# Altium PCB LTR-329ALS-01 StemmaQT.PcbDoc
Units mil, origin at the board's own origin, x right, y up, seen from the top; angles counter-clockwise.
Board outline 1102.05 x 426.75 mil, 2 copper layers (Top Layer, Bottom Layer), stack 61.756 mil thick; 8 components, 7 nets, 39 pads, 19 vias.
Unrouted connection lines stored in the file: 11.
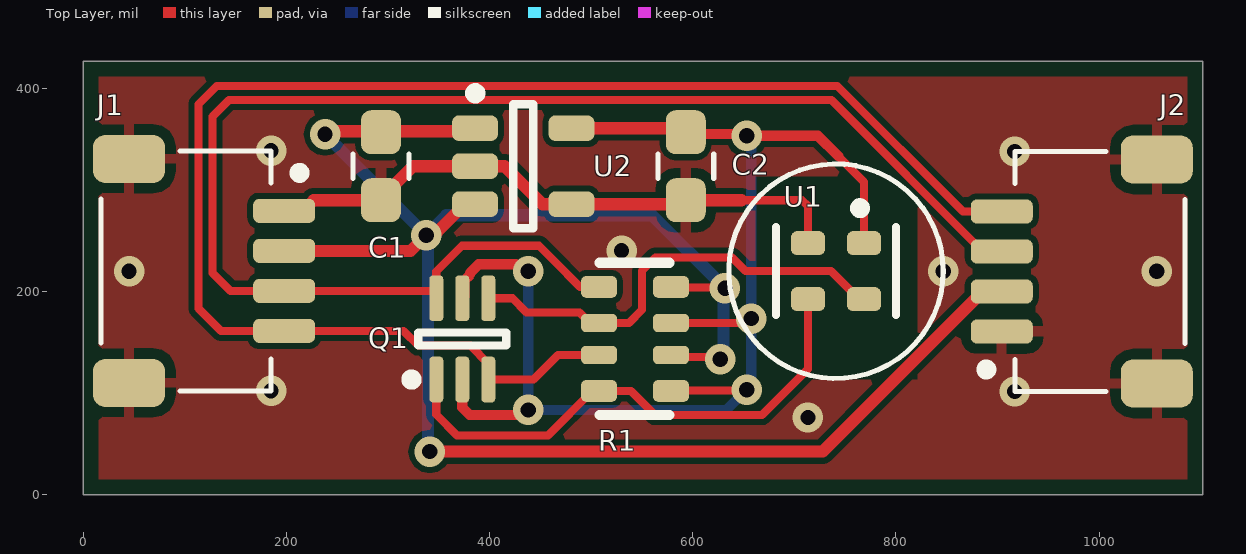
[diagram p0: Top Layer view]
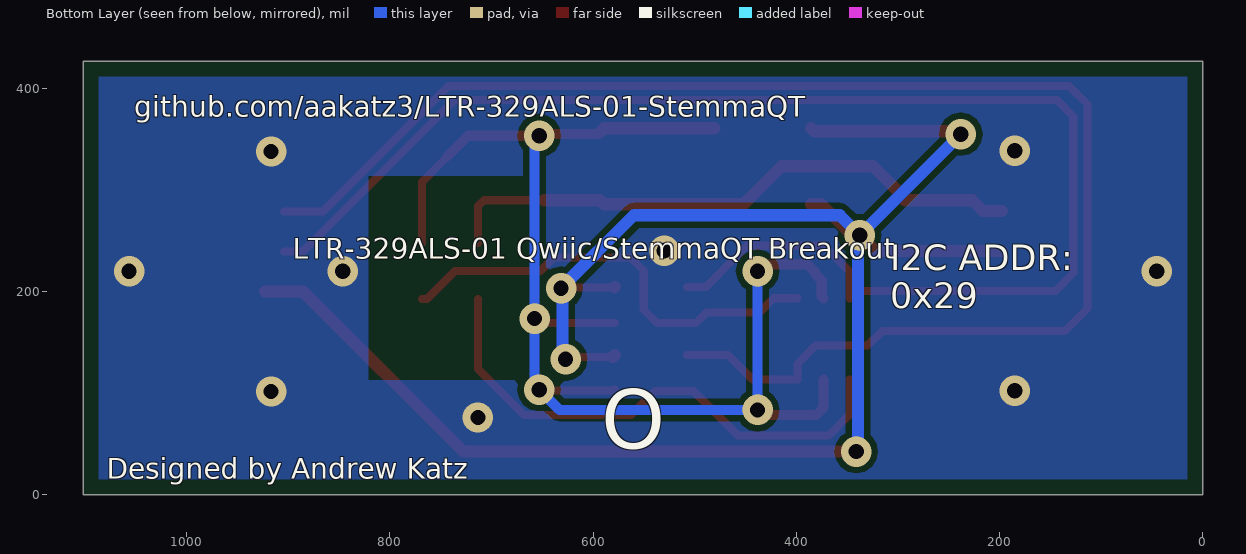
[diagram p1: Bottom Layer view, seen from below]
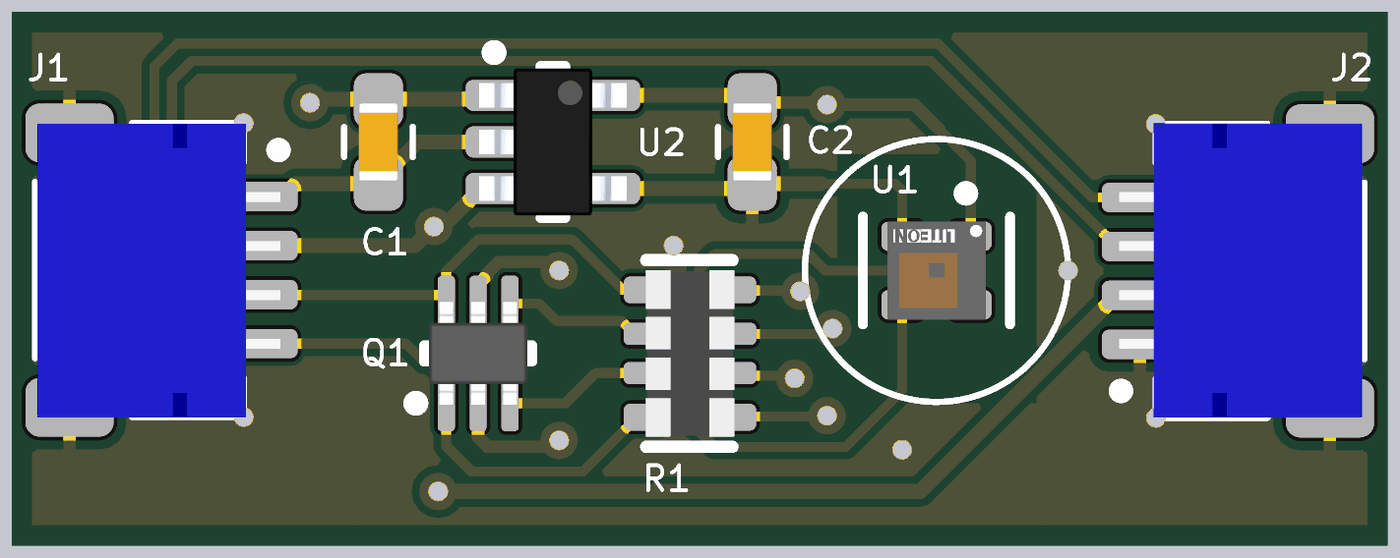
[diagram p2: 3D render of the assembled board from above, using the file's embedded part models]

## Layer stack, top to bottom
Top Solder: solder mask 1, SM-001, Dk 4
Top Layer: signal copper 1.378
Dielectric 1: core 59, Core-043, Dk 4.3
Bottom Layer: signal copper 1.378
Bottom Solder: solder mask 1, SM-001, Dk 4

## Board outline
0,426.75 1102.05,426.75 1102.05,0 0,0

## Design rules (kind name [scope] priority, off if disabled: settings)
BoardOutlineClearance EdgeComp [InComponentClass('EDGE')] p1: gap=0 ignorepadtopadclearanceinfootprint=FALSE
BoardOutlineClearance IgnoreSilkOverhang [OnSilkscreen and InAnyComponent] p2: gap=0 ignorepadtopadclearanceinfootprint=FALSE
BoardOutlineClearance SilkClearance [OnSilkscreen] p3: gap=10 ignorepadtopadclearanceinfootprint=FALSE
BoardOutlineClearance [All] p4: gap=15 ignorepadtopadclearanceinfootprint=FALSE
Clearance [All] p1: gap=6 ignorepadtopadclearanceinfootprint=FALSE except(0: Arc-Hole Track-Hole SMDPad-Hole THPad-Hole Via-Hole Fill-Hole Poly-Hole Region-Hole Text-Hole)
ComponentClearance [All] p1: gap=1 collisioncheckmode=3 verticalgap=1 showdistances=FALSE
DiffPairsRouting [All] p1: maxlimit=393.7 minlimit=6 mostfreqgap=8 toplayer_minwidth=6 toplayer_maxwidth=15 toplayer_prefwidth=8 bottomlayer_minwidth=6 bottomlayer_maxwidth=15 bottomlayer_prefwidth=8 maxuncoupledlength=500
HoleSize [All] p1: absolutevalues=TRUE maxlimit=265 minlimit=13 maxpercent=80.000 minpercent=20.000
HoleToHoleClearance [All] p1: gap=10 allowstackedmicrovias=FALSE
MinimumAnnularRing [All] p1: minimumring=7
MinimumSolderMaskSliver [All] p1: minsoldermaskwidth=0
PlaneClearance [All] p1: clearance=10
PlaneConnect [All] p1: planeconnectstyle=Direct reliefexpansion=16 reliefentries=4 reliefconductorwidth=6 reliefairgap=6
PolygonConnect PolygonConnect_1 [All] p1: thpad.connectstyle=Relief thpad.reliefconductorwidth=20 thpad.reliefentries=4 thpad.polygonreliefangle="90 Angle" thpad.airgapwidth=10 smdpad.connectstyle=Relief smdpad.reliefconductorwidth=10 smdpad.reliefentries=4 smdpad.polygonreliefangle="90 Angle" smdpad.airgapwidth=10 via.connectstyle=Direct via.reliefconductorwidth=10 via.reliefentries=4 via.polygonreliefangle="90 Angle" via.airgapwidth=10
PolygonConnect [All] p2: connectstyle=Relief reliefconductorwidth=8 reliefentries=4 polygonreliefangle="90 Angle" airgapwidth=6
RoutingCorners [All] p1: cornerstyle=45-Degree minsetback=49.21 maxsetback=49.21
RoutingVias [All] p1: holewidth=15 width=30 viastyle="Through Hole" minholewidth=13 minwidth=27 maxholewidth=100 maxwidth=114
SilkToSilkClearance [All] p1: silktosilkclearance=0
SilkToSolderMaskClearance [IsPad] p1: minsilkscreentomaskgap=6 clearancetoexposedcopper=TRUE
SolderMaskExpansion TentVia [IsVia] p1: expansion=4 istentingtop=TRUE
SolderMaskExpansion [All] p2: expansion=2.95 istentingtop=FALSE
Width [All] p1: maxlimit=400 minlimit=6 preferedwidth=8
20 further rules are at their usual default settings.

## Classes and differential pairs
component class EDGE: J1 J2
net class PWR: GND VCC VINT
polygon class PowerPolys: GNDB GNDT

## Components (designator, comment, footprint, x,y, rotation, side; value= is the part's Value field where it differs from the comment)
C1 "CAP 0603 1UF 16V 10% X7R" 0603_CAP 293.19,323.31 r90 top value=1UF
C2 "CAP 0603 1UF 16V 10% X7R" 0603_CAP 593.19,323.31 r90 top value=1UF
J1 "4 Pin, 1mm" SM04B-SRSS-TB 117.83,220 r270 top
J2 "4 Pin, 1mm" SM04B-SRSS-TB 984.22,220 r90 top
Q1 "Dual N-Channel MOSFET" SOT363 373.19,153.31 r90 top
R1 "10k ohm resistor array" CAY16-J4 543.19,153.31 r180 top value=10K
U1 "Ambient Light Sensor" LTR-329ALS-01-MFG 741.01,220 r180 top
U2 "2.5V LDO" SOT23-5 433.19,323.31 r270 top

## Footprints (in the part's own frame and the unit in brackets; to place one, negate y for a bottom-side part, rotate by r counter-clockwise, add the part's x,y. Pads: shape width x height; smd on the part's side, far side on the other; paste and mask are expansions set on the pad)
0603_CAP [mm]
  rrect50% 1.1x1 smd: 1(-0.85,0) 2(0.85,0)
  silkscreen extent -0.3,-0.7 0.3,0.7, body extent -0.8,-0.4 0.8,0.4, height 0.6
CAY16-J4 [mm]
  rrect50% 0.9x0.55 smd: 1(-0.9,1.3) 4(-0.9,-1.3) 5(0.9,-1.3) 8(0.9,1.3)
  rrect50% 0.9x0.45 smd: 2(-0.9,0.4) 3(-0.9,-0.4) 6(0.9,-0.4) 7(0.9,0.4)
  silkscreen extent -0.86,-1.91 0.89,1.91, body extent -0.9,-1.7 0.9,1.7, height 0.61
LTR-329ALS-01-MFG [mm]
  rrect50% 0.85x0.6 smd: 1(-0.7,-0.7) 2(0.7,-0.7) 3(0.7,0.7) 4(-0.7,0.7)
  silkscreen extent -1.5,-1.7 1.5,1.1, body extent -1,-1 1,1, height 0.9
SM04B-SRSS-TB [mm]
  rrect50% 0.6x1.55 smd: 1(-1.508,2.032) 2(-0.508,2.032) 3(0.492,2.032) 4(1.492,2.032)
  rrect50% 1.2x1.8 smd: S1(-2.808,-1.843) S2(2.792,-1.843)
  silkscreen extent -3.01,-2.54 2.99,2.52, body extent -3,-2.5 3,2.45, height 2.94
SOT23-5 [mil]
  rrect50% 25x45 smd: 1(-37.4,-47.5) 2(0,-47.5) 3(37.4,-47.5) 4(37.4,47.5) 5(-37.4,47.5)
  silkscreen extent -77,-52 61,10, body extent -59,-59 59,59, height 51
SOT363 [mil]
  rrect50% 45x13.78 smd: 1(-40,25.59) 2(-40,0) 3(-40,-25.59) 4(40,-25.59) 5(40,0) 6(40,25.59)
  silkscreen extent -45,-43 7,55, body extent -41,-39 41,39, height 39

## Part data
C1 C2: "Capacitor Surface Mount 0603 Footprint 1UF 16V 10% Tolerance Ceramic X7R", Manufacturer=Various, PCB Package=0603, Supplier Part Number 1=1276-1943-1-ND, Tolerance=10%, Voltage=16V, ComponentLink1Description="Manufacturer Website", ComponentLink2Description="Component Datasheet", ComponentLink3Description="Octopart Link", Description in Visual="Cap SMT 0603 1UF 16V 10% Ceramic X7R", Manufacturer P/N=Various, P/N="CAP 0603 1UF 16V 10% X7R", Supplier 1=Digi-Key, Supplier 2=Digi-Key, Supplier 3=Digi-Key, Supplier 4=Digi-Key, Supplier Part Number 2=311-1446-1-ND, Supplier Part Number 3=587-3305-1-ND, Supplier Part Number 4=399-7847-1-ND, Type="Ceramic X7R", Val=1UF, Vol=16V
J1 J2: library part SM04B-SRSS-TB, "JST 4-Pin SR Series, SMD (1MM, 4 Pos)", Manufacturer="J.S.T. Mfg. Co.,Ltd", Manufacturer P/N=SM04B-SRSS-TB(LF)(SN), Supplier Part Number 1=455-1804-6-ND, ClassName=EDGE, ComponentLink1Description="Manufacturer Website", ComponentLink1URL=http://www.jst-mfg.com/index_e.php, ComponentLink2Description="Component Datasheet", ComponentLink2URL=http://www.jst-mfg.com/product/pdf/eng/eSH.pdf, Description in Visual="JST 4-Pin SR Series, SMD (1MM, 4 Pos)", Mount=SMD, Number of Contacts=4, Orientation=Horizontal, P/N=SM04B-SRSS-TB, Supplier 1=Digi-Key, Type=SR
Q1: library part BSS138BKS, "Dual N-Channel Trench MOSFET, 60 V, 0.32 A SOT-363", Manufacturer="NXP Semiconductors", Manufacturer P/N=BSS138BKS,115, PCB Package=SOT-363, Supplier Part Number 1=1727-6478-1-ND, ComponentLink1Description="Manufacturer Website", ComponentLink1URL=#http://www.nxp.com/#, ComponentLink2Description="Component Datasheet", ComponentLink2URL=http://www.nxp.com/documents/data_sheet/BSS138BKS.pdf, ComponentLink4Description="Package Specification", ComponentLink4URL=http://www.nxp.com/documents/outline_drawing/sot363_po.pdf, Configuration="Dual N-Channel", Description in Visual="Mosfet Array 2 N-Channel (Dual) 60V 320mA 445mW Surface Mount 6-TSSOP SOT-363", ID (mA)=320, P/N=BSS138BKS, Supplier 1=Digi-Key, VDSS (V)=60, VGSS (V)=+/-20
R1: library part CAY16-103J4LF, "10k Ohm ±5% 62.5mW Power Per Element Isolated  Resistor Network/Array ±200ppm/°C 1206 (3216 Metric), Convex, Long Side Terminals", Manufacturer="Bourns Inc.", PCB Package=CAY16-J4, Power Rating=62.5mW, Supplier Part Number 1=CAY16-103J4LFCT-ND, Temperature Coefficient=±200ppm/°C, Tolerance (%)=5%, ComponentLink1Description="Manufacturer Website", ComponentLink1URL=#https://www.bourns.com/#, ComponentLink2Description="Component Datasheet", ComponentLink2URL=#https://www.bourns.com/docs/Product-Datasheets/CATCAY.pdf#, ComponentLink3Description="Octopart Link", ComponentLink3URL=#https://octopart.com/cay16-103j4lf-bourns-152968?r=sp#, Description in Visual="RES ARRAY 4 RES 10K OHM 1206", Manufacturer P/N=CAY16-103J4LF, P/N=CAY16-103J4LF, Quantity=4, Supplier 1=Digi-Key
U1: library part LTR-329ALS-01, "Optical Sensor Ambient  I²C 4-VDFN", Manufacturer="Lite-On Inc.", Operating Temperature Range="-30°C to 70°C", PCB Package=VDFN-4, Supplier Part Number 1=160-2160-1-ND, ComponentLink1Description="Manufacturer's Website", ComponentLink1URL=https://www.liteon.com/en-us, ComponentLink2Description="Component Datasheet", ComponentLink2URL=https://optoelectronics.liteon.com/upload/download/DS86-2014-0006/LTR-329ALS-01_DS_V1.pdf, Description in Visual="Optical Sensor Ambient  I²C 4-VDFN", I2C Address=0x29, Manufacturer P/N=LTR-329ALS-01, P/N=LTR-329ALS-01, Supplier 1=Digi-Key, Vout (V)="Open Drain", Vs (max) (V)=3.60, Vs (min) (V)=2.40
U2: library part LP5907MFX-2.5, "Linear Voltage Regulator IC  1 Output  250mA SOT-23-5", Manufacturer="Texas Insturments", Manufacturer P/N=LP5907MFX-2.5/NOPB, Output Current=250mA, Output Voltage (Volts)=2.5V, PCB Package=SOT23-5, Quiescent Current (mA)=0.025, Supplier Part Number 1=296-40356-1-ND, Temperature Range="-40°C - 125°C", Vin Max (Volts)=5.5, Vin Min (Volts)=2.75, ComponentLink1Description="Manufacturer's Website", ComponentLink1URL=http://www.ti.com##, ComponentLink2Description="Component Datasheet", ComponentLink2URL=https://www.ti.com/lit/ds/symlink/lp5907.pdf?HQS=TI-null-null-digikeymode-df-pf-null-wwe&ts=1595385050787, Description in Visual="IC REG LINEAR 2.5V 250MA SOT23-5", Features=Control, Layout Considerations="See Datasheet Page 18", P/N=LP5907MFX-2.5, Supplier 1=Digi-Key, Type=LDO

## Via types
v1: diameter 30, hole 15, Top Layer to Bottom Layer, tented both sides, 19 vias

## Nets (pads, with @x,y where several pads share a name; then routed paths per layer and width w, separated by ;. In a path a pad name is that pad's centre, name@x,y a point inside that pad or via, vN(x,y) a via of type N, cw(c..) or ccw(c..) an arc to the next point about the centre after c; other vN are vias at no path point)
GND: C1.1 C2.1 J1.1 J1.S1 J1.S2 J2.1 J2.S1 J2.S2 U1.2 U2.2 U2.4 | length 590.9
  Top Layer w8: 648.01,289.84 707.59,289.84 713.45,283.98 U1.2
  Top Layer w12: J1.1 216.54,279.37 227.01,289.84 C1.1 293.19,291.81 324.68,323.31 U2.2 414.79,323.31 452.19,285.91 U2.4 589.25,285.91 C2.1 648.01,289.84
  other v1: 713.45,75.98 185.04,102.2 917.01,101.57 45.28,220 846.62,220 1056.78,220 530,240 185.04,338.43 917.01,337.8
SCL: J1.4 J2.4 Q1.3 R1.7 | length 1493.1
  Top Layer w8: R1.7 467.44,137.56 443.19,113.31 Q1.3 398.78,128.92 390.08,137.62 390.08,137.93 381.2,146.81 329.88,146.81 315.43,161.26 J1.4 135.63,161.26 123.9,172.99 113.46,183.42 113.46,384.33 131.56,402.43 742.26,402.43 865.94,278.74 J2.4
SCL_I: Q1.4 R1.6 U1.4 | length 445.9
  Top Layer w8: Q1.4 422.53,193.31 436.39,179.44 488.51,179.44 498.9,169.06 537.33,169.06 550.26,181.98 550.26,220.38 563.19,233.31 638.54,233.31 651.85,220 736.08,220 763.64,192.44 U1.4
SDA: J1.3 J2.3 Q1.6 R1.5 | length 1438
  Top Layer w8: Q1.6 Q1.6@347.6,197.74 ; R1.5 489.06,204.49 463.19,230.36 448.54,245 372.79,245 347.6,219.81 347.6,200.63 347.28,200.31 198.16,200.31 J1.3 145,200.63 127.46,218.16 127.46,372.39 143.5,388.43 736.46,388.43 885.52,239.37 J2.3
SDA_I: Q1.1 R1.8 U1.3 | length 524.3
  Top Layer w8: Q1.1 347.6,78.86 368.02,58.44 457.41,58.44 501.09,102.13 R1.8 539.11,102.13 562.93,78.31 668.19,78.31 713.45,123.57 U1.3
VCC: C1.2 J1.2 J2.2 R1.2 R1.4 U2.1 U2.3 | length 1862.8
  Top Layer w8: R1.4@579.21,203.9 631.08,203.9 v1(631.67,203.31) ; R1.2@580.75,135.43 v1@625.06,135.43
  Top Layer w12: J1.2 322.38,240 v1(337.68,255.31) 341.13,258.75 348.53,258.75 375.69,285.91 U2.3 ; v1(238.19,354.8) 241.14,357.76 382.74,357.76 U2.1 ; v1(341.13,42.44) 727.96,42.44 885.52,200 J2.2 J2.2@922.92,200 ; R1.2 R1.2@580.75,135.43 ; R1.4 R1.4@579.21,203.9 ; v1@625.06,135.43 v1(627.19,133.31)
  Bottom Layer w12: v1(238.19,354.8) v1(337.68,255.31) ; v1(341.13,42.44) 339.41,44.16 339.41,253.59 v1(337.68,255.31) ; v1(627.19,133.31) 630.19,136.31 v1@630.19,200.31 ; v1(631.67,203.31) 559.98,275 357.38,275 v1(337.68,255.31)
VINT: C2.2 Q1.2 Q1.5 R1.1 R1.3 U1.1 U2.5 | length 1336.2
  Top Layer w8: R1.3 648.01,169.06 652.26,173.31 v1(657.67,173.31) ; R1.1@579.21,102.72 v1@652.6,102.72 ; 743.19,333.31 768.57,307.93 U1.1
  Top Layer w10: Q1.2 373.19,85.81 380.51,78.48 433.23,78.48 v1(438.19,83.44) ; Q1.5 375.08,195.2 375.08,210.81 380.89,216.62 380.89,218.35 389.35,226.81 425.97,226.81 432.78,220 v1(438.19,220) ; R1.1 R1.1@579.21,102.72 ; C2.2 594.92,355.04 651.46,355.04 v1(653.19,353.31) 723.19,353.31 743.19,333.31 ; v1@652.6,102.72 v1(653.19,103.31)
  Top Layer w12: U2.5 589.25,360.71 C2.2
  Bottom Layer w10: v1(438.19,220) 438.19,78.31 443.32,83.44 633.32,83.44 657.67,107.79 v1(657.67,173.31) 657.67,343.41 653.19,347.9 v1(653.19,353.31)

## Polygon pours and split planes (outlines as drawn)
GND on Top Layer "GNDT" (solid, remove dead copper, pour order 0): 0,426.75 1102.05,426.75 1102.05,0 0,0
GND on Bottom Layer "GNDB" (solid, remove dead copper, pour order 1): 0,426.75 1102.05,426.75 1102.05,0 0,0

## Other copper
Top Layer:
  pour cut-out: 661.33,113.31 661.33,313.31 821.33,313.31 821.33,113.31
Bottom Layer:
  pour cut-out: 820.68,113.31 820.68,313.31 660.68,313.31 660.68,113.31

## Silkscreen, mask and mechanical layers (free items; w line width, h text height)
Top Overlay:
  circle w5: c741.01,220 r105.61
Bottom Overlay:
  text "github.com/aakatz3/LTR-329ALS-01-StemmaQT" at 1051.88,372.19 h20
  text "LTR-329ALS-01 Qwiic/StemmaQT Breakout" at 895.53,232.05 h20
  text "I2C ADDR: / 0x29" at 307.84,183.61 h25
  text "O" at 592.08,26.05 h100
  text "Designed by Andrew Katz" at 1078.72,15.5 h20
Board Outline:
  the board outline again, w1
CAM Title Block:
  drawing of 59 lines, arcs and shapes, not listed
  text "1" at -101.45,6776.6 h48.36
  text "2" at 2641.67,6776.6 h48.36
  text "3" at 5394.79,6776.6 h48.36
  text "4" at 8140.42,6776.6 h48.36
  text "A" at -1374.63,5814.46 h48.36
  text "A" at 9426.1,5814.46 h48.36
  text "B" at -1369.63,3689.25 h48.36
  text "B" at 9430.27,3689.25 h48.36
  text "C" at -1370.46,1564.88 h48.36
  text "C" at 9429.43,1564.88 h48.36
  text "D" at -1372.96,-560.33 h48.36
  text "D" at 9426.93,-560.33 h48.36
  text "Title:" at 5837.53,-641.2 h65.87
  text "'.Pcb_File_Name_No_Path'" at 6187.71,-662.32 h63.36
  text "*" at 6087.66,-755.42 h32.52
  text "*" at 6087.66,-815.45 h32.52
  text "Desc:" at 5837.53,-827.96 h42.52
  text "*" at 6087.66,-875.48 h32.52
  text "Letter" at 6037.63,-1023.06 h42.52
  text "Auth:" at 6437.85,-1023.06 h42.52
  text "Proj:" at 7537.6,-1023.06 h42.52
  text "Size:" at 5837.53,-1028.06 h42.52
  text ".ProjAuth" at 6687.48,-1045 h42.52
  text ".ProjShrtName" at 7737.84,-1045 h42.52
  text "1" at 7837.76,-1162.71 h37.52
  text "1" at 8137.91,-1162.71 h37.52
  text "Date:" at 5837.53,-1168.96 h37.52
  text "'.ModifiedDate'" at 6087.66,-1168.96 h37.52
  text "Time:" at 6838.06,-1168.96 h37.52
  text "'.ModifiedTime'" at 7048.17,-1168.96 h37.52
  text "Sheet" at 7537.6,-1168.96 h37.52
  text "of" at 7987.84,-1168.96 h37.52
  text "Repo:" at 5837.53,-1259 h37.52
  text ".ProjGitURL" at 6087.84,-1260 h37.52
  text "File:" at 5837.53,-1359.05 h37.52
  text "'.Pcb_File_Name'" at 6087.66,-1359.05 h37.52
  text "1" at -101.45,-1522.47 h48.36
  text "2" at 2641.67,-1522.47 h48.36
  text "3" at 5394.79,-1522.47 h48.36
  text "4" at 8140.42,-1522.47 h48.36

## Dimensions
0,0 to 1102.05,0 on Open (Mech16)
1102.05,426.75 to 1102.05,0 on Open (Mech16)

## Text inside footprints (layer, text, board x,y; h text height)
C1: Librarian Notes "SS 102512, ADDED SILKSCREEN." at 267.19,265.31 h1 r90
C2: Librarian Notes "SS 102512, ADDED SILKSCREEN." at 567.19,265.31 h1 r90
Q1: Librarian Notes "1. MT 011410, COPIED F/P FROM DCK-6 AT TEXAS INSTRUMENTS LIBRARY." at 317.19,126.31 h1 r90; Librarian Notes "FOOTPRINT HISTORY" at 315.19,126.31 h1 r90; Librarian Notes "2. JB 121812 CORRECTED COURTYARD OUTLINE TO SPACEX STANDARDS." at 319.19,126.31 h1 r90
U2: Librarian Notes "LOCATION: SOT.PCBLIB" at 512.19,383.31 h1 r270; Librarian Notes "HISTORY: MT 082510, UPDATED STEP FILE." at 510.19,383.31 h1 r270